# EAGLE board sensors_b (EAGLE 9.5.1)
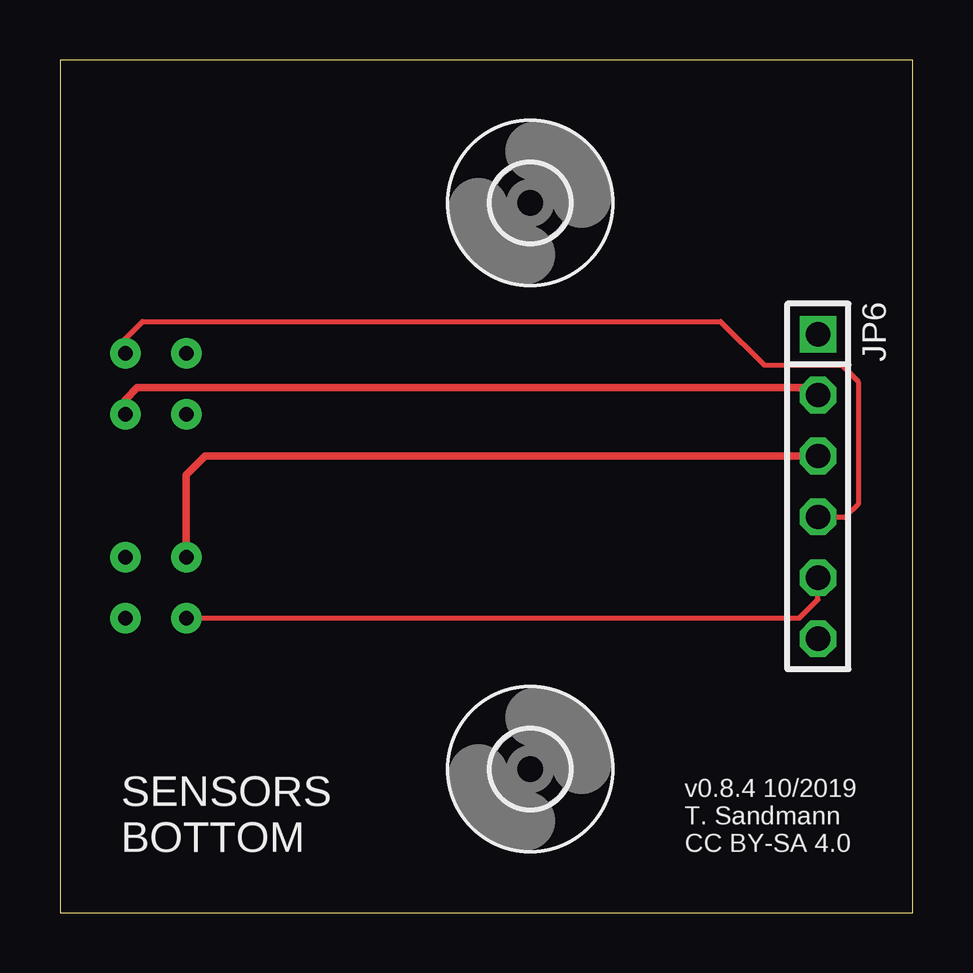
[diagram p0: board, top side]
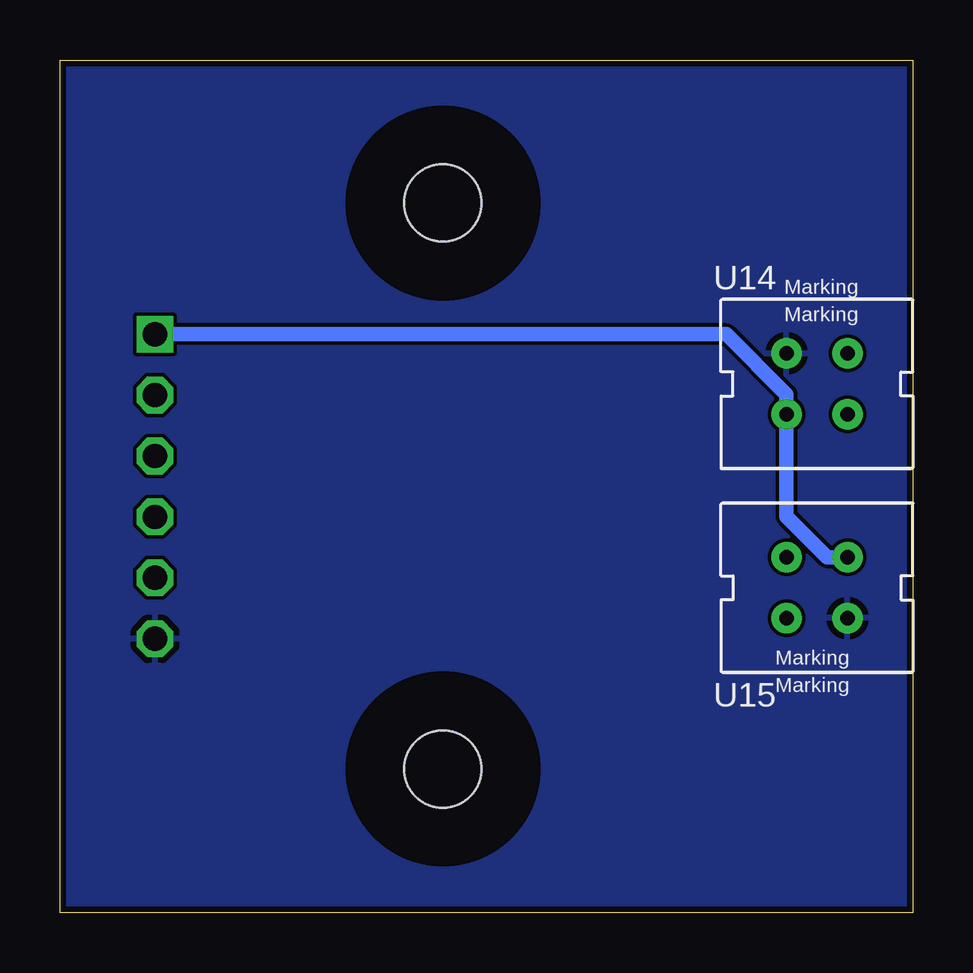
[diagram p1: board, bottom side, seen from below]

Size 35.56 x 35.56 mm. Coordinates in mm from the lower left corner, seen from the top.
Outline: 0,0 35.56,0 35.56,35.56 0,35.56 0,0
Copper layers (1*16): Top 0.035mm / dielectric 1.5mm / Bottom 0.035mm
Design rules "jlcpcb_2layer_DRU": minimum track width 6mil, minimum drill 0.3mm, track to track 6mil, track to pad 6mil, pad to pad 6mil, via to via 6mil, smd to smd 6mil, copper to edge 10mil, drill to drill 6mil, minimum pad ring 10mil, minimum via ring 8mil, stop-mask expansion 4mil, vias tented up to drill 0mil, thermal gap 10mil

## Footprints (pad centres in the part's own frame; a part is rotated, then mirrored left to right if it is on the bottom)
3,2 = hole 3.2: 0,0
1X06 = drill 1.016 square: 1 -6.35,0 | drill 1.016 octagon: 2 -3.81,0; 3 -1.27,0; 4 1.27,0; 5 3.81,0; 6 6.35,0
4 = drill 0.61 pad 1.27: A -1.27,1.27; C 1.27,-1.27; E 1.27,1.27; K -1.27,-1.27

## Placement (x,y rotation side)
H1  MOUNT-HOLE3.2  [3,2]  19.6,29.6 0 top
H2  MOUNT-HOLE3.2  [3,2]  19.6,6 0 top
JP6  [1X06]  31.6,17.78 270 top
U14  LINE_L  [4]  4,22.06 90 bottom
U15  LINE_R  [4]  4,13.56 270 bottom

## Library data of the parts
H1 H2 = myholes
JP6 U14 U15 = ct-bot

## Nets
+5V: JP6.1 U14.A U15.A
GND: JP6.6 U14.E U15.E
LINE_L: JP6.4 U14.C
LINE_R: JP6.5 U15.C
LOWSIDE_LINE_L: JP6.2 U14.K
LOWSIDE_LINE_R: JP6.3 U15.K

## Tracks (layer width: path | path; a pad name or v marks a point on that pad's centre or on a via)
+5V
  Bottom 0.61: JP6.1 7.79,24.13 5.27,21.61 U14.A 5.27,16.54 3.56,14.83 U15.A
GND
  pour Bottom: -0.53,36.25 36.05,36.25 36.05,-0.42 -0.57,-0.42 -0.57,36.29
LINE_L
  Top 0.203: U14.C 2.73,23.95 3.44,24.66 27.53,24.66 29.37,22.83 32.59,22.83 33.27,22.15 33.27,17.03 32.73,16.49 31.62,16.49 JP6.4
LINE_R
  Top 0.203: U15.C 30.83,12.29 31.6,13.06 JP6.5
LOWSIDE_LINE_L
  Top 0.305: U14.K 2.73,21.41 3.22,21.91 31.28,21.91 JP6.2
LOWSIDE_LINE_R
  Top 0.305: U15.K 5.27,18.27 6.05,19.05 JP6.3

## Text on the board
tNames: SENSORS / BOTTOM | v0.8.4 10/2019 / T. Sandmann / CC BY-SA 4.0